# EAGLE board MicroLipoV1.1 (EAGLE 7.6.0)
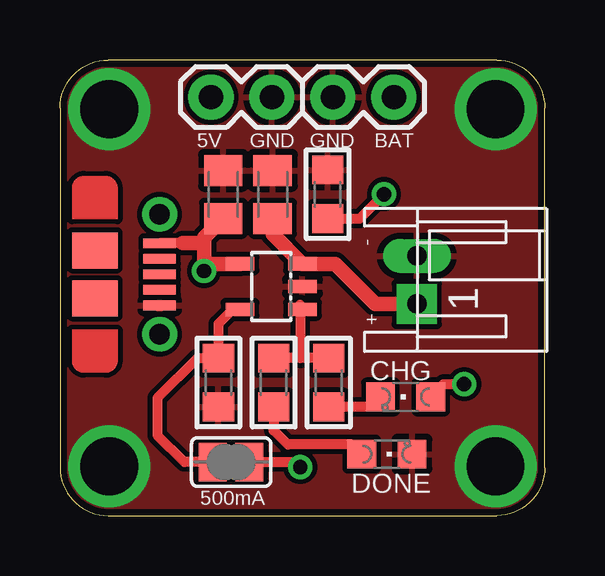
[diagram p0: board, top side]
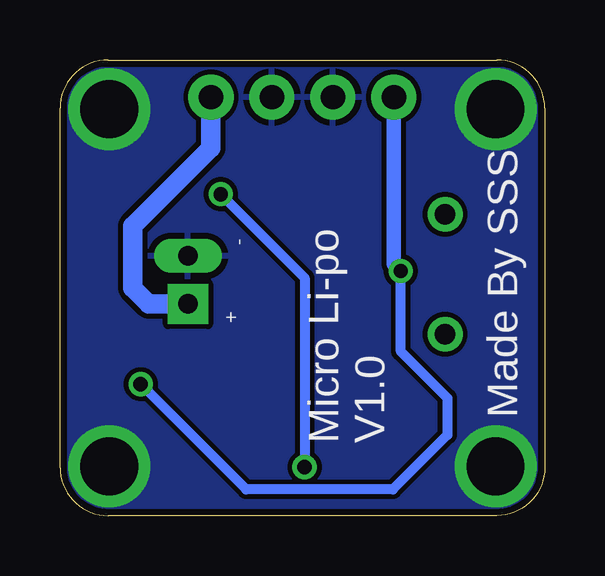
[diagram p1: board, bottom side, seen from below]

Size 20.2 x 19 mm. Coordinates in mm from the lower left corner, seen from the top.
Outline: 2,0 18.2,0 arc90 20.2,2 20.2,17 arc90 18.2,19 2,19 arc90 0,17 0,2 arc90 2,0
Copper layers (1*16): Top 0.035mm / dielectric 1.5mm / Bottom 0.035mm
Design rules "default *": minimum track width 0.00508125mm, minimum drill 0.3mm, track to track 8mil, track to pad 8mil, pad to pad 8mil, via to via 8mil, smd to smd 8mil, copper to edge 0.28mm, drill to drill 8mil, minimum pad ring 10mil, minimum via ring 8mil, stop-mask expansion 4mil, vias tented up to drill 0mil, thermal gap 10mil

## Footprints (pad centres in the part's own frame; a part is rotated, then mirrored left to right if it is on the bottom)
C0805K = smd 1.3 x 1.6: 1 -1,0; 2 1,0
CHIPLED_0805 = smd 1.2 x 1.2: A 0,-1.05; C 0,1.05
USB-MICRO-MOLEX-105017-0001 = smd 0.4 x 1.35: 1 1.2,0; 2 1.85,0; 3 2.5,0; 4 3.15,0; 5 3.8,0 | drill 0.85 pad 1.45: P$1 0,0; P$2 5,0 | smd 1.5 x 1.9: P$3 3.5,-2.7; P$4 1.5,-2.7
JST-PH2-S2B = drill 0.813 pad 1.676 square: 1 -1.977,2.169 | drill 0.813 pad 1.422 long: 2 -3.977,2.169
SOT23-5L = smd 0.55 x 1.2: 1 -0.95,-1.3; 2 0,-1.3; 3 0.95,-1.3; 4 0.95,1.3; 5 -0.95,1.3
1X02 = drill 1.016 pad 1.88: 1 0,0; 2 2.54,0
R0805 = smd 1.2 x 1.3: 1 -1.016,0; 2 1.016,0
SJ = smd 1.168 x 1.6: 1 -0.762,0; 2 0.762,0

## Placement (x,y rotation side)
C1  10uF  [C0805K]  6.8,13.39 270 top
C2  10uF  [C0805K]  8.86,13.39 270 top
CHG  [CHIPLED_0805]  14.4,4.95 90 top
CN1  USB-CON-5PIN-105017-0001  [USB-MICRO-MOLEX-105017-0001]  4.15,12.56 270 top
CN2  [JST-PH2-S2B]  12.7,6.85 270 top
DONE  [CHIPLED_0805]  13.62,2.56 270 top
IC1  MCP73831  [SOT23-5L]  8.8,9.55 90 top
JP2  [1X02]  6.29,17.45 0 top
JP3  [1X02]  11.37,17.45 0 top
R1  470  [R0805]  8.9,5.55 270 top
R2  470  [R0805]  11.2,5.55 90 top
R3  10K  [R0805]  6.6,5.55 270 top
R4  2.5K  [R0805]  11.15,13.4 90 top
SJ1  [SJ]  7.13,2.23 180 top

## Library data of the parts
C1 C2 = rcl
CHG DONE = adafruit
CN1 = GeekAmmo
CN2 = con-jst-ph
IC1 = microchip-update-2
JP2 JP3 = SparkFun
R1-R4 = rc-master-smd
SJ1 = jumper

## Nets
5V: C1.2 CHG.A CN1.1 IC1.4 JP2.1
GND: C1.1 C2.1 CN1.5 CN2.2 DONE.C IC1.2 JP2.2 JP3.1 R3.2 R4.2
N$1: CHG.C R2.1
N$2: DONE.A R1.2
N$3: R4.1 SJ1.1
PROG: IC1.5 R3.1 SJ1.2
STAT: IC1.1 R1.1 R2.2
V+: C2.2 CN2.1 IC1.3 JP3.2

## Tracks (layer width: path | path; a pad name or v marks a point on that pad's centre or on a via)
5V  (via drill 0.6)
  Top 0.406: 5.12,11.36 CN1.1 4.11,11.36 | CHG.A 15.98,5.48 v16.84,5.48
  Top 0.61: C1.2 6,11.59 6,11.36 | 6,11.36 v6,10.2 6,10.5 IC1.4 | 5.12,11.36 6,11.36
  Bottom 0.406: v16.84,5.48 12.45,1.09 6.33,1.09 4.06,3.36 4.06,4.9 6,6.84 v6,10.2
  Bottom 0.61: JP2.1 6.29,10.49 v6,10.2
GND  (via drill 2.4)
  other vias: 2.05,2.05 18.15,2.05 18.15,16.95 2.05,16.95
  pour Bottom: -1,20 -1,-1 21.2,-1 21.2,20
  pour Top: -1,20 -1,-1 21.2,-1 21.2,20
N$1
  Top 0.406: CHG.C 12.93,4.53 R2.1
N$2
  Top 0.406: R1.2 8.9,3.55 9.49,2.96 12.17,2.96 DONE.A
N$3  (via drill 0.6)
  Top 0.406: SJ1.1 9.8,2.23 v10.01,2.02 | R4.1 12.48,12.38 v13.5,13.4
  Bottom 0.406: v10.01,2.02 10.01,9.91 v13.5,13.4
PROG
  Top 0.254: 6.58,6.55 R3.1
  Top 0.406: R3.1 6.6,8 7.2,8.6 IC1.5 | 6.58,6.55 5.71,6.55 4.06,4.9 4.06,3.35 5.18,2.23 SJ1.2
STAT
  Top 0.406: IC1.1 10,8.8 10,6.56 9.99,6.57 | 9.99,6.57 R1.1 | R2.2 9.99,6.57
V+
  Top 0.406: C2.2 8.86,12.04
  Top 0.61: CN2.1 13.13,8.83 11.46,10.5 IC1.3 8.86,11.74 8.86,12.04
  Bottom 0.813: CN2.1 16.51,8.83 17.17,9.49 17.17,12.07 13.91,15.33 JP3.2

## Text on the board
tPlace: 5V | GND | GND | BAT | - | + | 500mA
bPlace: - | +
bNames: Made By SSS | Micro Li-po / V1.0